# EAGLE board DME_Board_1 (EAGLE 7.2.0)
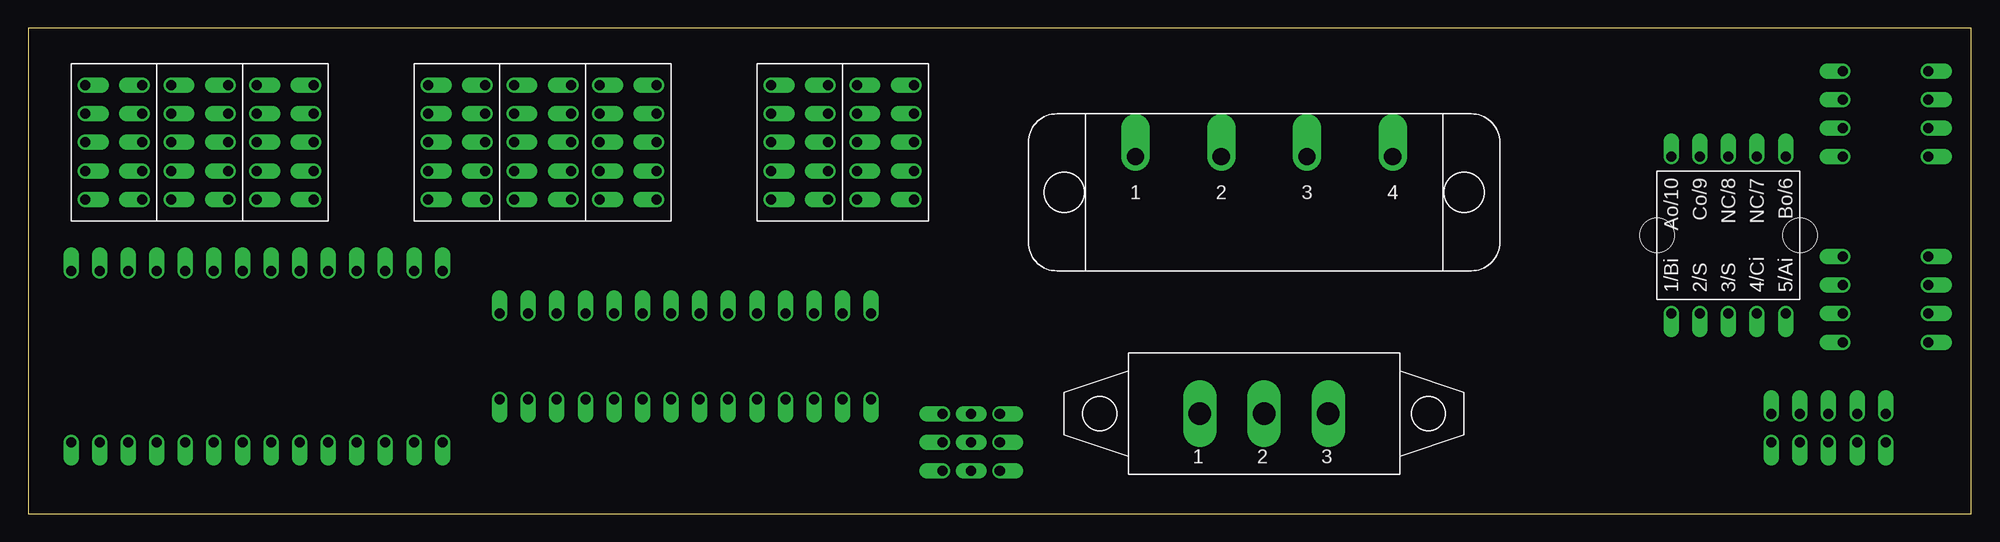
[diagram p0: board, top side]
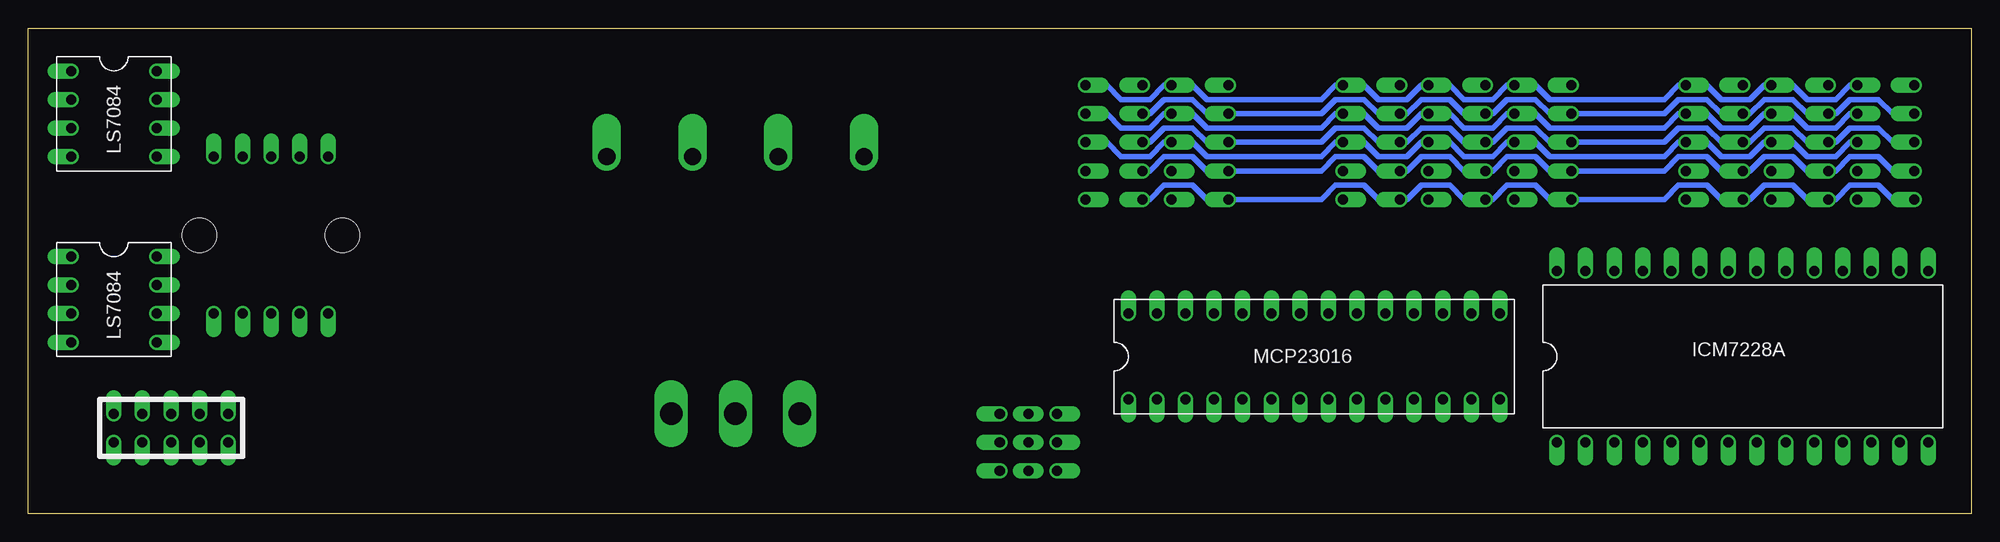
[diagram p1: board, bottom side, seen from below]

Size 172.72 x 43.18 mm. Coordinates in mm from the lower left corner, seen from the top.
Outline: 0,43.18 0,0 172.72,0 172.72,43.18 0,43.18
Copper layers (1*16): Top 0.035mm / dielectric 1.5mm / Bottom 0.035mm
Design rules "RadioStack_v2": minimum track width 0.2mm, minimum drill 0.4mm, track to track 0.2mm, track to pad 0.2mm, pad to pad 0.2mm, via to via 0.2mm, smd to smd 0.2mm, copper to edge 0.5mm, drill to drill 8mil, minimum pad ring 10mil, minimum via ring 8mil, stop-mask expansion 4mil, vias tented up to drill 0mil, thermal gap 10mil

## Footprints (pad centres in the part's own frame; a part is rotated, then mirrored left to right if it is on the bottom)
SA3611EWA = drill 0.889 pad 1.27 offset: 1 0,0; 2 0,-2.54; 3 0,-5.08; 4 0,-7.62; 5 0,-10.16; 6 5.08,-10.16; 7 5.08,-7.62; 8 5.08,-5.08; 9 5.08,-2.54; 10 5.08,0
ELMA_E37 = drill 0.889 pad 1.27 offset: 1 0,0; 2 0,-2.54; 3 0,-5.08; 4 0,-7.62; 5 0,-10.16; 6 13.97,-10.16; 7 13.97,-7.62; 8 13.97,-5.08; 9 13.97,-2.54; 10 13.97,0 | hole 3.048: 6.985,1.27; 6.985,-11.43
46311LD = drill 1.524 pad 2.54 offset: 1 0,0; 2 7.62,0; 3 15.24,0; 4 22.86,0
REZISTOR = drill 0.762 pad 1.27 offset: P$1 -5.08,0; P$2 5.08,0
T220 = drill 1.999 pad 2.54 long: P$1 0,0; P$2 5.715,0; P$3 11.43,0
ICM7228A = drill 0.889 pad 1.27 offset: P$1 0,0; P$2 0,-2.54 | drill 0.889 offset: P$3 0,-5.08; P$4 0,-7.62; P$5 0,-10.16; P$6 0,-12.7; P$7 0,-15.24; P$8 0,-17.78; P$9 0,-20.32; P$10 0,-22.86; P$11 0,-25.4; P$12 0,-27.94; P$13 0,-30.48; P$14 0,-33.02; P$15 15.24,-33.02; P$16 15.24,-30.48; P$17 15.24,-27.94; P$18 15.24,-25.4; P$19 15.24,-22.86; P$20 15.24,-20.32; P$21 15.24,-17.78; P$22 15.24,-15.24; P$23 15.24,-12.7; P$24 15.24,-10.16; P$25 15.24,-7.62; P$26 15.24,-5.08; P$27 15.24,-2.54; P$28 15.24,0
MCP23016 = drill 0.889 pad 1.27 offset: A0 7.62,-30.48; A1 7.62,-27.94; A2 7.62,-25.4; CLK 0,-20.32; GP0.0 7.62,-17.78; GP0.1 7.62,-15.24; GP0.2 7.62,-12.7; GP0.3 7.62,-10.16; GP0.4 7.62,-7.62; GP0.5 7.62,-5.08; GP0.6 7.62,-2.54; GP0.7 7.62,0; GP1.0 0,-2.54; GP1.1 0,-5.08; GP1.2 0,-7.62; GP1.3 0,-10.16; GP1.4 0,-15.24; GP1.5 0,-25.4; GP1.6 0,-27.94; GP1.7 0,-30.48; SCL 0,-33.02; SDA 7.62,-33.02; TP 0,-22.86; VDD 7.62,-20.32; VSS1 0,0; VSS2 0,-17.78; VSS3 7.62,-22.86; ~INT 0,-12.7
LISTA_2X5 = drill 0.889 pad 1.27 offset: 1 0,0; 2 0,-2.54; 3 0,-5.08; 4 0,-7.62; 5 0,-10.16; 6 2.54,-10.16; 7 2.54,-7.62; 8 2.54,-5.08; 9 2.54,-2.54; 10 2.54,0
LS7084 = drill 0.889 pad 1.27 offset: P$1 0,0; P$2 0,-2.54; P$3 0,-5.08; P$4 0,-7.62; P$5 7.62,-7.62; P$6 7.62,-5.08; P$7 7.62,-2.54; P$8 7.62,0
KONDENZATOR = drill 0.762 pad 1.27 offset: P$1 -2.54,0; P$2 2.54,0
ADRESA_0..2 = drill 0.889 pad 1.27 offset: P$1 0,0; P$2 0,-2.54; P$3 0,-5.08; P$7 5.08,0; P$8 5.08,-2.54; P$9 5.08,-5.08 | drill 0.889 pad 1.27 long: P$4 2.54,-5.08; P$5 2.54,-2.54; P$6 2.54,0

## Placement (x,y rotation side)
U$1  SA3611EWA  [SA3611EWA]  73.66,38.1 0 top
U$2  SA3611EWA  [SA3611EWA]  66.04,38.1 0 top
U$3  SA3611EWA  [SA3611EWA]  50.8,38.1 0 top
U$4  SA3611EWA  [SA3611EWA]  43.18,38.1 0 top
U$5  SA3611EWA  [SA3611EWA]  5.08,38.1 0 top
U$6  SA3611EWA  [SA3611EWA]  12.7,38.1 0 top
U$7  SA3611EWA  [SA3611EWA]  20.32,38.1 0 top
U$8  SA3611EWA  [SA3611EWA]  35.56,38.1 0 top
U$9  ELMA_E37  [ELMA_E37]  146.05,17.78 90 top
U$10  46311LD  [46311LD]  98.42,31.75 0 top
U$11  [REZISTOR]  132.08,-6.35 180 top  (outside the outline)
U$12  T220  [T220]  104.14,8.89 0 top
U$13  [REZISTOR]  132.08,-10.16 0 top  (outside the outline)
U$14  ICM7228A  [ICM7228A]  36.83,6.35 90 bottom
U$15  [REZISTOR]  132.08,-13.97 0 top  (outside the outline)
U$16  MCP23016  [MCP23016]  74.93,10.16 90 bottom
U$17  LISTA_2X5  [LISTA_2X5]  154.94,8.89 270 bottom
U$19  [REZISTOR]  132.08,-17.78 0 top  (outside the outline)
U$21  LS7084  [LS7084]  168.91,39.37 0 bottom
U$22  LS7084  [LS7084]  168.91,22.86 0 bottom
U$23  KONDENZATOR  [KONDENZATOR]  132.08,-22.86 0 top  (outside the outline)
U$24  ADRESA_0..2  [ADRESA_0..2]  81.28,8.89 0 top
U$25  [REZISTOR]  107.95,-5.08 0 top  (outside the outline)
U$26  [REZISTOR]  107.95,-8.89 0 top  (outside the outline)
U$27  [REZISTOR]  107.95,-12.7 0 top  (outside the outline)
U$28  [REZISTOR]  107.95,-16.51 0 top  (outside the outline)
U$29  [REZISTOR]  107.95,-20.32 0 top  (outside the outline)
U$30  [REZISTOR]  107.95,-24.13 0 top  (outside the outline)
U$31  [REZISTOR]  107.95,-27.94 0 top  (outside the outline)

## Library data of the parts
U$1-U$17 U$19 U$21-U$31 = RadioStack_v2

## Nets
N$1: U$1.10 U$2.10 U$3.10 U$4.10 U$5.10 U$6.10 U$7.10 U$8.10
N$2: U$1.9 U$2.9 U$3.9 U$4.9 U$5.9 U$6.9 U$7.9 U$8.9
N$3: U$1.8 U$2.8 U$3.8 U$4.8 U$5.8 U$6.8 U$7.8 U$8.8
N$4: U$1.5 U$2.5 U$3.5 U$4.5 U$5.5 U$6.5 U$7.5 U$8.5
N$6: U$1.2 U$2.2 U$3.2 U$4.2 U$5.2 U$6.2 U$7.2 U$8.2
N$7: U$1.3 U$2.3 U$3.3 U$4.3 U$5.3 U$6.3 U$7.3 U$8.3
N$9: U$1.4 U$2.4 U$3.4 U$4.4 U$5.4 U$6.4 U$7.4 U$8.4
N$16: U$5.1
N$17: U$6.1
N$18: U$7.1
N$19: U$8.1

## Tracks (layer width: path | path; a pad name or v marks a point on that pad's centre or on a via)
N$1
  Bottom 0.508: U$5.10 10.79,38.1 12.06,36.83 14.61,36.83 15.88,38.1 U$6.10 18.41,38.1 19.68,36.83 22.23,36.83 23.5,38.1 U$7.10 26.04,38.1 27.3,36.83 37.47,36.83 38.73,38.1 U$8.10 41.27,38.1 42.55,36.83 45.09,36.83 46.35,38.1 U$4.10 48.9,38.1 50.16,36.83 52.7,36.83 53.98,38.1 U$3.10 56.52,38.1 57.78,36.83 67.94,36.83 69.22,38.1 U$2.10 71.75,38.1 73.03,36.83 75.56,36.83 76.83,38.1 U$1.10
N$2
  Bottom 0.508: U$5.9 10.79,35.56 12.06,34.29 14.61,34.29 15.88,35.56 U$6.9 18.41,35.56 19.68,34.29 22.23,34.29 23.5,35.56 U$7.9 26.04,35.56 27.3,34.29 37.47,34.29 38.73,35.56 U$8.9 41.27,35.56 42.55,34.29 45.09,34.29 46.35,35.56 U$4.9 48.9,35.56 50.16,34.29 52.7,34.29 53.98,35.56 U$3.9 56.52,35.56 57.78,34.29 67.94,34.29 69.22,35.56 U$2.9 71.75,35.56 73.03,34.29 75.56,34.29 76.83,35.56 U$1.9
N$3
  Bottom 0.508: U$5.8 10.79,33.02 12.06,31.75 14.61,31.75 15.88,33.02 U$6.8 18.41,33.02 19.68,31.75 22.23,31.75 23.5,33.02 U$7.8 26.04,33.02 27.3,31.75 37.47,31.75 38.73,33.02 U$8.8 41.27,33.02 42.55,31.75 45.09,31.75 46.35,33.02 U$4.8 48.9,33.02 50.16,31.75 52.7,31.75 53.98,33.02 U$3.8 56.52,33.02 57.78,31.75 67.94,31.75 69.22,33.02 U$2.8 71.75,33.02 73.03,31.75 75.56,31.75 76.83,33.02 U$1.8
N$4
  Bottom 0.508: U$5.5 6.99,27.94 8.26,29.21 10.79,29.21 12.06,27.94 U$6.5 14.61,27.94 15.88,29.21 18.41,29.21 19.68,27.94 U$7.5 22.23,27.94 23.5,29.21 26.04,29.21 27.3,27.94 U$8.5 37.47,27.94 38.73,29.21 41.27,29.21 42.55,27.94 U$4.5 45.09,27.94 46.35,29.21 48.9,29.21 50.16,27.94 U$3.5 52.7,27.94 53.98,29.21 56.52,29.21 57.78,27.94 U$2.5 67.94,27.94 69.22,29.21 71.75,29.21 73.03,27.94 U$1.5
N$6
  Bottom 0.508: U$5.2 6.99,35.56 8.26,36.83 10.79,36.83 12.06,35.56 U$6.2 14.61,35.56 15.88,36.83 18.41,36.83 19.68,35.56 U$7.2 22.23,35.56 23.5,36.83 26.04,36.83 27.3,35.56 U$8.2 37.47,35.56 38.73,36.83 41.27,36.83 42.55,35.56 U$4.2 45.09,35.56 46.35,36.83 48.9,36.83 50.16,35.56 U$3.2 52.7,35.56 53.98,36.83 56.52,36.83 57.78,35.56 U$2.2 67.94,35.56 69.22,36.83 71.75,36.83 73.03,35.56 U$1.2
N$7
  Bottom 0.508: U$5.3 6.99,33.02 8.26,34.29 10.79,34.29 12.06,33.02 U$6.3 14.61,33.02 15.88,34.29 18.41,34.29 19.68,33.02 U$7.3 22.23,33.02 23.5,34.29 26.04,34.29 27.3,33.02 U$8.3 37.47,33.02 38.73,34.29 41.27,34.29 42.55,33.02 U$4.3 45.09,33.02 46.35,34.29 48.9,34.29 50.16,33.02 U$3.3 52.7,33.02 53.98,34.29 56.52,34.29 57.78,33.02 U$2.3 67.94,33.02 69.22,34.29 71.75,34.29 73.03,33.02 U$1.3
N$9
  Bottom 0.508: U$5.4 6.99,30.48 8.26,31.75 10.79,31.75 12.06,30.48 U$6.4 14.61,30.48 15.88,31.75 18.41,31.75 19.68,30.48 U$7.4 22.23,30.48 23.5,31.75 26.04,31.75 27.3,30.48 U$8.4 37.47,30.48 38.73,31.75 41.27,31.75 42.55,30.48 U$4.4 45.09,30.48 46.35,31.75 48.9,31.75 50.16,30.48 U$3.4 52.7,30.48 53.98,31.75 56.52,31.75 57.78,30.48 U$2.4 67.94,30.48 69.22,31.75 71.75,31.75 73.03,30.48 U$1.4

## Text on the board
bPlace: Display 1 | Seg A | Display 2 | Seg F | Display 3 | Seg B | Display 4 | Seg G | N/C | Seg C | N/C | Seg E | Enc1 A | Enc1 B | N/C | Seg D | Enc2 A | Enc2 B | N/C | N/C | Enc3 A | Enc3 B | Button | N/C | Enc4 A | Enc4 B | Diode | N/C | GND | VCC | Transponder v2.0 - Board 1